# EAGLE board 3ch mix 1.2 (EAGLE 6.5.0)
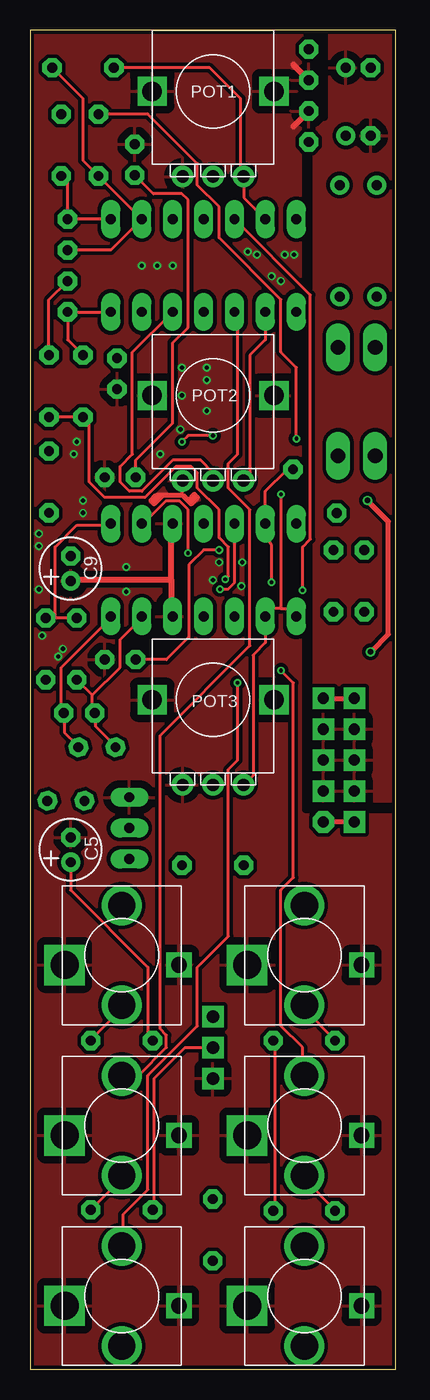
[diagram p0: board, top side]
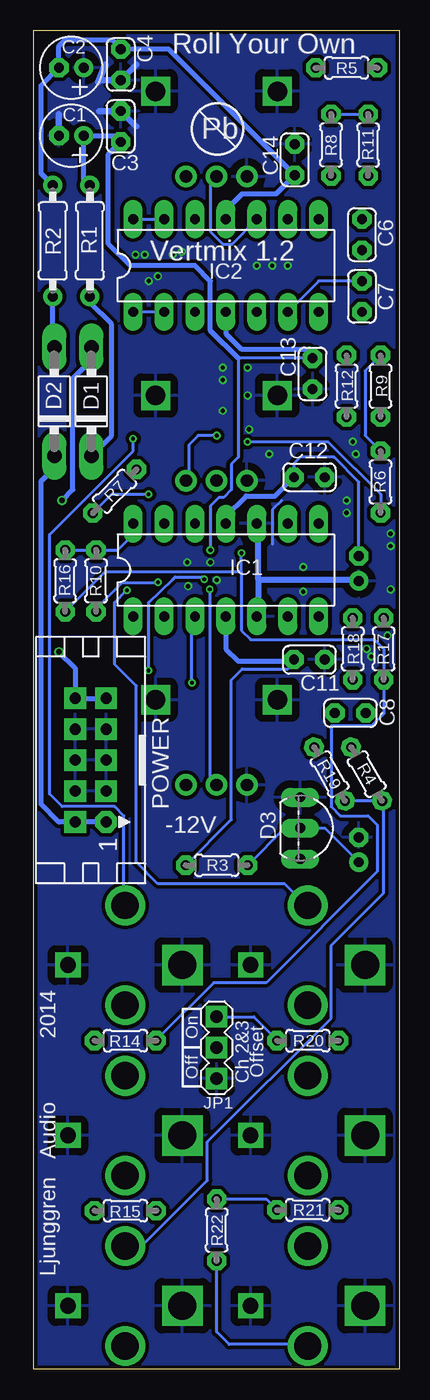
[diagram p1: board, bottom side, seen from below]

Size 30 x 110 mm. Coordinates in mm from the lower left corner, seen from the top.
Outline: 30,0 30,110 0,110 0,0 30,0
Copper layers (1*16): Top 0.035mm / dielectric 1.5mm / Bottom 0.035mm
Design rules "hackvana 15 mil pads 24 mil thermal": minimum track width 6mil, minimum drill 0.3mm, track to track 6mil, track to pad 6mil, pad to pad 6mil, via to via 6mil, smd to smd 0mil, copper to edge 6mil, drill to drill 6mil, minimum pad ring 15mil, minimum via ring 6mil, stop-mask expansion 2mil, vias tented up to drill 100mil, thermal gap 24mil
tRestrict: area 22.6,54.4 to 22.9,100.1; area 22.6,46 to 22.9,54.4; area 22.9,46 to 30,46.2; area 23.9,102.9 to 24.1,110; area 4.3,64.5 to 11.9,65.3; area 11.2,63.2 to 11.9,64.5; area 11.2,65.3 to 11.9,68.1; area 3,63.8 to 3.6,64; area 11.4,70.9 to 11.9,71.1; area 11.4,60.2 to 11.9,60.5; area 22.6,104.1 to 23.1,105.2
bRestrict: area 22.6,46 to 22.9,54.4; area 22.9,99.8 to 30,100.1; area 27.7,46.7 to 27.9,53.3; area 4.3,64.5 to 11.9,65.3; area 11.2,65.3 to 11.9,68.1; area 11.2,63.2 to 11.9,64.5; area 3,63.8 to 3.6,64; area 11.4,70.9 to 11.9,71.1; area 11.4,60.2 to 11.9,60.5; area 22.6,104.1 to 23.1,105.2

## Footprints (pad centres in the part's own frame; a part is rotated, then mirrored left to right if it is on the bottom)
E2-5 = drill 0.813 pad 1.27: + -1.016,0 | drill 0.813 pad 1.27 octagon: - 1.016,0
C025-024X044 = drill 0.813 octagon: 1 -1.27,0; 2 1.27,0
DO41-7 = drill 1.2 pad 1.6 long: A 4.445,0; C -4.445,0
TO92-LINE = drill 0.813 long: 1 2.54,0; 2 0,0; 3 -2.54,0
DIL14 = drill 0.813 long: 1 -7.62,-3.81; 2 -5.08,-3.81; 3 -2.54,-3.81; 4 0,-3.81; 5 2.54,-3.81; 6 5.08,-3.81; 7 7.62,-3.81; 8 7.62,3.81; 9 5.08,3.81; 10 2.54,3.81; 11 0,3.81; 12 -2.54,3.81; 13 -5.08,3.81; 14 -7.62,3.81
ERTHENVAR = drill 2.3 square: RING1 -4.7,-0.8 | drill 1.3 square: RING2 4.7,-0.8 | drill 2.25: SHUNT 0,-4.1; TIP 0,4.1
MA03-1 = drill 1.016 square: 1 -2.54,0; 2 0,0; 3 2.54,0
POT-ALPHA9 = drill 1.6 pad 2.184 square: GND$1 -5,0; GND$2 5,0 | drill 1: LEFT -2.5,-7; MID 0,-7; RIGHT 2.5,-7
CON10L = drill 0.914 pad 1.778 octagon: 1 5.08,1.27 | drill 0.914 pad 1.778 square: 2 5.08,-1.27; 3 2.54,1.27; 4 2.54,-1.27; 5 0,1.27; 6 0,-1.27; 7 -2.54,1.27; 8 -2.54,-1.27; 9 -5.08,1.27; 10 -5.08,-1.27
0207/9 = drill 0.813: 1 -4.58,0; 2 4.58,0
0204/5 = drill 0.813 octagon: 1 -2.54,0; 2 2.54,0

## Placement (x,y rotation side)
C1  10uF  [E2-5]  26.92,101.35 180 bottom
C2  10uF  [E2-5]  26.92,106.93 180 bottom
C3  100nF  [C025-024X044]  22.86,102.11 90 bottom
C4  100nF  [C025-024X044]  22.86,107.19 90 bottom
C5  10uF  [E2-5]  3.3,42.67 90 top
C6  68pF  [C025-024X044]  3.05,93.22 270 bottom
C7  68pF  [C025-024X044]  3.05,88.14 90 bottom
C8  68pF  [C025-024X044]  4,53.91 0 bottom
C9  10uF  [E2-5]  3.3,65.79 90 top
C11  100nF  [C025-024X044]  7.37,58.29 0 bottom
C12  100nF  [C025-024X044]  7.37,73.28 180 bottom
C13  100nF  [C025-024X044]  7.11,81.79 270 bottom
C14  100nF  [C025-024X044]  8.57,99.38 270 bottom
D1  SB130  [DO41-7]  25.27,79.5 90 bottom
D2  SB130  [DO41-7]  28.32,79.5 90 bottom
D3  LM4040 5V  [TO92-LINE]  8.13,44.45 270 bottom
IC1  TL074  [DIL14]  14.22,65.66 0 bottom
IC2  TL074  [DIL14]  14.22,90.68 0 bottom
IN1  ERTHENVAR_3.5MM_JACK  [ERTHENVAR]  7.5,34 0 top
IN2  ERTHENVAR_3.5MM_JACK  [ERTHENVAR]  7.5,20 0 top
IN3  ERTHENVAR_3.5MM_JACK  [ERTHENVAR]  7.5,6 0 top
JP1  [MA03-1]  14.99,26.42 90 bottom
OUT1  ERTHENVAR_3.5MM_JACK  [ERTHENVAR]  22.5,34 0 top
OUT2  ERTHENVAR_3.5MM_JACK  [ERTHENVAR]  22.5,20 0 top
OUT3  ERTHENVAR_3.5MM_JACK  [ERTHENVAR]  22.5,6 0 top
POT1  22K  [POT-ALPHA9]  15,105 0 top
POT2  22K  [POT-ALPHA9]  15,80 0 top
POT3  22K  [POT-ALPHA9]  15,55 0 top
POWER  [CON10L]  25.34,50.04 270 bottom
R1  10R  [0207/9]  25.4,92.71 90 bottom
R2  10R  [0207/9]  28.45,92.71 90 bottom
R3  10K  [0204/5]  14.99,41.4 180 bottom
R4  330R  [0204/5]  2.67,48.9 300 bottom
R5  22K  [0204/5]  4.32,106.93 0 bottom
R6  22K  [0204/5]  1.52,72.9 90 bottom
R7  22K  [0204/5]  23.37,72.14 45 bottom
R8  22K  [0204/5]  5.59,100.58 90 bottom
R9  22K  [0204/5]  1.52,80.77 270 bottom
R10  22K  [0204/5]  24.89,64.77 90 bottom
R11  330R  [0204/5]  2.54,100.58 90 bottom
R12  330R  [0204/5]  4.32,80.77 270 bottom
R14  22K  [0204/5]  22.48,26.99 0 bottom
R15  22K  [0204/5]  22.48,13.02 0 bottom
R16  22K  [0204/5]  27.43,64.77 270 bottom
R17  22K  [0204/5]  1.27,59.18 90 bottom
R18  22K  [0204/5]  3.81,59.18 270 bottom
R19  22K  [0204/5]  5.71,48.9 300 bottom
R20  22K  [0204/5]  7.49,26.99 0 bottom
R21  22K  [0204/5]  7.49,13.08 0 bottom
R22  22K  [0204/5]  14.99,11.43 270 bottom

## Library data of the parts
C1-C9 C11-C14 D1-D3 IC1 IC2 IN1-IN3 OUT1-OUT3 POT1-POT3 R1-R12 R14-R22 = Roll Your Own
JP1 POWER = Roll Your Own; OC_FARNELL: unknown; OC_NEWARK: unknown

## Nets
0V: C1.- C2.+ C3.2 C4.1 C5.- C9.+ C11.2 C12.1 C13.2 C14.1 D3.3 IC1.5 IC1.10 IN1.RING1 IN1.RING2 IN2.RING1 IN2.RING2 IN3.RING1 IN3.RING2 JP1.1 OUT1.RING1 OUT1.RING2 OUT2.RING1 OUT2.RING2 OUT3.RING1 OUT3.RING2 POT1.GND$1 POT1.GND$2 POT1.LEFT POT2.GND$1 POT2.GND$2 POT2.LEFT POT3.GND$1 POT3.GND$2 POT3.LEFT POWER.3 POWER.4 POWER.5 POWER.6 POWER.7 POWER.8
+12V: C1.+ C3.1 C11.1 C13.1 IC1.4 IC2.4 R1.2 R3.2
-12V: C2.- C4.2 C9.- C12.2 C14.2 IC1.11 IC2.11 R2.2
N$1: D1.A POWER.9 POWER.10
N$2: D2.C POWER.1 POWER.2
N$3: IC1.8 R17.2 R18.1
N$4: C8.1 IC1.6 R18.2 R19.1
N$5: D1.C R1.1
N$6: D2.A R2.1
N$7: C5.+ D3.2 JP1.3 R3.1 R20.1
N$8: C6.1 IC2.8 R11.1
N$9: IC2.12 IN1.TIP
N$10: IC2.3 IN2.TIP
N$11: IC1.3 IN3.TIP
N$12: IC2.13 IC2.14 POT1.RIGHT R5.1
N$13: IC2.1 IC2.2 POT2.RIGHT R6.1
N$14: IC1.1 IC1.2 POT3.RIGHT R7.1
N$15: C6.2 IC2.9 R5.2 R8.1
N$16: IC2.10 POT1.MID
N$17: IC2.5 POT2.MID
N$18: IC1.12 POT3.MID
N$19: OUT1.TIP R8.2 R11.2
N$20: OUT2.TIP R9.2 R12.2
N$21: C7.2 IC2.6 R6.2 R9.1
N$22: IC1.13 R7.2 R10.1
N$23: OUT3.TIP R4.2 R19.2
N$24: C7.1 IC2.7 R12.1
N$25: IC1.14 R10.2 R16.1
N$26: OUT1.SHUNT R14.1
N$27: OUT2.SHUNT R15.1
N$28: IC1.9 R14.2 R15.2 R16.2 R17.1
N$29: C8.2 IC1.7 R4.1
N$30: IN1.SHUNT R20.2
N$31: IN2.SHUNT R21.2
N$32: IN3.SHUNT R22.2
N$33: JP1.2 R21.1 R22.1

## Tracks (layer width: path | path; a pad name or v marks a point on that pad's centre or on a via)
0V  (via drill 0.35)
  Top 0.23: 12.45,73.15 12.45,71.88 12.51,71.82
  Top 0.25: 3.56,64.9 3.43,64.77 C9.+ | IC1.10 11.56,69.34 11.56,69.09 | 11.56,62.23 11.68,62.1 IC1.5
  Top 0.4: 10.79,71.82 10.35,71.82 9.91,71.37 10.16,71.12 10.79,71.75 10.79,71.82 | 10.79,71.82 12.51,71.82 12.95,71.37 | 12.95,71.37 13.21,71.12 13.72,71.63 13.46,71.88 12.95,71.37
  Top 0.5: 21.59,102.11 22.61,103.12 | C4.1 21.59,107.19 | 3.56,65.02 3.56,64.9 11.56,64.9 | 11.56,64.9 11.56,69.09 | 11.56,64.9 11.56,62.23
  Bottom 0.23: 9.65,71.37 10.41,70.61 10.41,67.75
  Bottom 0.25: 11.56,62.23 11.68,62.1 IC1.5
  Bottom 0.5: C4.1 21.59,107.19 | C3.2 21.59,102.11 | 11.56,64.9 3.56,64.9 | 11.56,64.9 11.56,69.09 | 11.56,64.9 11.56,62.23
  Bottom 0.55: 24.13,107.19 24.7,105.73 | C4.1 24.51,105.92 | C3.2 24.64,103.38 | C1.- 27.94,103.12
  other vias: 18.61,91.57 14.48,82.3 12.45,82.3 12.45,80.01 12.32,77.22 14.48,81.28 14.48,78.74 20.57,89.41 19.81,89.79 17.84,91.82 20.89,91.57 21.65,91.57 11.68,90.68 10.41,90.68 9.14,90.68 4.32,71.37 3.81,76.2 3.56,75.18 0.7,68.64 0.7,67.63 0.7,64.07 4.32,70.36 7.87,65.91 7.87,63.88 0.95,60.26 2.67,59.18 2.29,58.55 15.49,66.29 14.99,64.83 10.67,75.18 17.4,66.29 17.34,64.33
  pour Bottom (isolate 0.305): -0.07,0 -0.07,110.03 30,110.03 30,0
  pour Top (isolate 0.305): -0.07,0.1 -0.07,110.03 30,110.03 30,-0.1 -0.18,-0.1
+12V  (via drill 0.35)
  Top 0.25: v15.49,67.31 14.22,67.31 13.02,66.1 13.02,60.13 11.18,58.29 C11.1
  Bottom 0.23: R3.2 13.78,45.15 13.78,56.64 12.89,57.53 9.14,57.53 8.64,58.04 C11.1
  Bottom 0.25: C13.1 13.21,83.06 13.21,74.93 13.78,74.36 13.78,72.26 14.41,71.63 14.8,71.63 15.49,70.93 v15.49,67.31
  Bottom 0.4: R1.2 25.91,97.8 C1.+ 23.37,101.35 C3.1 23.88,99.82 23.88,92.46 22.1,90.68 16.76,90.68 15.49,89.41 15.49,85.34 13.21,83.06 | IC2.4 14.22,85.09 12.95,83.82 7.37,83.82 7.11,83.57 C13.1 | IC1.4 14.22,59.18 13.21,58.17 8.76,58.17 C11.1
-12V
  Top 0.25: C12.2 8.64,74.68 11.68,77.72 11.68,84.33 12.95,85.6 12.95,96.08 12.45,96.58 10.1,96.58 C14.2
  Bottom 0.25: C9.- 3.3,72.9 5.33,74.93 8.13,74.93 8.64,74.42 C12.2
  Bottom 0.4: R2.2 29.4,98.24 29.4,105.47 C2.- 27.94,108.71 27.43,109.22 23.62,109.22 C4.2 18.92,108.46 C14.2 10.1,96.58 12.89,96.58 14.22,95.25 IC2.11 | IC1.11 14.22,70.1 12.57,71.75 10.16,71.75 C12.2
N$1  (via drill 0.45)
  Top 0.4: POWER.9 POWER.10 | v27.69,71.37 29.4,69.66 29.4,60.39 v27.94,58.93
  Bottom 0.4: POWER.9 POWER.10 26.61,57.59 v27.94,58.93 | v27.69,71.37 26.8,72.26 26.8,81.41 25.4,82.8 25.4,83.82 D1.A
N$2
  Top 0.4: POWER.2 POWER.1
  Bottom 0.4: POWER.1 POWER.2 27.94,44.96 29.4,46.42 29.4,72.96 28.45,73.91 28.45,74.93 D2.C
N$3
  Top 0.23: R18.1 2.03,61.72 | 2.03,61.72 2.03,67.56 3.81,69.34 6.6,69.34 IC1.8 | 2.03,61.72 R17.2
N$4
  Top 0.23: R19.1 6.86,51.31 5.33,52.83 5.33,53.85 C8.1 5.08,54.1 5.08,55.37 | 5.08,55.37 R18.2 | 5.08,55.37 7.37,57.66 7.37,59.94 9.14,61.72 IC1.6
N$5
  Bottom 0.4: D1.C 23.62,76.71 23.62,85.85 25.4,87.63 R1.1
N$6
  Bottom 0.4: D2.A 28.45,84.07 R2.1
N$7
  Top 0.23: C5.+ 3.3,39.37 9.65,33.02 9.65,27.43 9.91,27.18 R20.1
  Bottom 0.23: JP1.3 11.94,28.96 10.16,27.18 R20.1 | C5.+ 6.1,44.45 D3.2 9.4,44.45 R3.1
N$8
  Top 0.23: IC2.8 C6.1 3.05,97.54 R11.1
N$9  (via drill 0.3)
  Top 0.23: v22.35,64.01 22.35,67.56 22.99,68.2 22.99,88.27 IC2.12
  Bottom 0.23: IN1.TIP 7.62,38.1 9.4,39.88 19.81,39.88 21.59,41.66 21.59,56.13 23.37,57.91 23.37,62.99 v22.35,64.01
N$10
  Top 0.23: IC2.3 17.02,86.61 17.02,75.18 16.26,74.42 16.26,72.39 18.03,70.61 18.03,59.44 10.67,52.07 10.67,27.94 11.18,27.43 11.18,26.42 8.89,24.13 7.62,24.13 IN2.TIP
N$11  (via drill 0.3)
  Top 0.23: v17.02,56.39 17.02,50.04 16.26,49.28 16.26,35.56 13.72,33.02 13.72,28.19 9.65,24.13 9.65,14.73 7.62,12.7 7.62,10.16 IN3.TIP
  Bottom 0.23: v17.02,56.39 17.02,61.59 IC1.3
N$12
  Top 0.23: R5.1 14.73,106.93 17.27,104.39 17.27,98.04 POT1.RIGHT 17.53,97.79 17.53,96.27 IC2.13
  Bottom 0.23: IC2.14 IC2.13
N$13  (via drill 0.3, 0.35)
  Top 0.23: v14.99,76.71 12.95,76.71 v12.45,76.2 | IC2.2 19.3,84.58 18.03,83.31 18.03,73.66 17.53,73.15 POT2.RIGHT
  Bottom 0.23: R6.1 1.52,71.88 5.84,76.2 v12.45,76.2 | IC2.2 IC2.1 | v14.99,76.71 16.51,76.71 17.27,75.95 17.27,73.23 POT2.RIGHT
N$14  (via drill 0.3)
  Top 0.23: v20.57,71.88 20.57,62.48 | 20.57,62.48 19.56,62.48 19.56,62.23 IC1.2 19.3,59.69 18.29,58.67 18.29,48.77 17.53,48.01 POT3.RIGHT | 20.57,62.48 21.59,62.48 21.84,62.23 IC1.1
  Bottom 0.23: R7.1 23.62,71.88 v20.57,71.88
N$15
  Top 0.23: C6.2 6.6,91.95 IC2.9 R8.1 4.32,99.31 4.32,104.39 R5.2
N$16
  Bottom 0.23: IC2.10 13.72,92.46 14.48,92.46 15.49,93.47 15.49,97.79 15.24,97.79 POT1.MID
N$17
  Top 0.23: IC2.5 8.38,83.57 8.38,75.18 7.37,74.17 7.37,72.9 8.13,72.14 9.14,72.14 11.68,74.68 13.97,74.68 14.99,73.66 14.99,73.15 POT2.MID
N$18  (via drill 0.3)
  Top 0.23: IC1.12 16.76,64.64 16.19,64.07 v15.56,64.07
  Bottom 0.23: v15.56,64.07 15.56,48.56 POT3.MID
N$19  (via drill 0.3)
  Top 0.23: R8.2 9.65,103.12 13.72,99.06 13.72,97.28 15.49,95.5 15.49,92.96 20.57,87.88 20.57,83.57 21.84,82.3 v21.84,76.45
  Bottom 0.23: R8.2 R11.2 | v21.84,76.45 21.84,75.44 28.7,68.58 28.7,47.24 27.69,46.23 23.37,46.23 22.61,45.47 22.61,38.1 OUT1.TIP
N$20  (via drill 0.3)
  Top 0.23: R9.2 R12.2 4.83,77.72 4.83,72.9 6.1,71.63 9.4,71.63 11.94,74.17 13.21,74.17 13.72,73.66 13.72,72.39 15.49,70.61 15.49,68.33 16.26,67.56 16.26,65.15 v16,64.9 | v20.57,57.4 21.59,56.39 21.59,40.39 20.57,39.37 20.57,28.19 22.35,26.42 22.35,24.13 OUT2.TIP
  Bottom 0.23: v16,64.9 16.19,65.09 18.41,65.09 18.61,64.9 20.57,62.99 v20.57,57.4
N$21
  Top 0.23: C7.2 1.52,87.88 R9.1
  Bottom 0.23: R6.2 2.79,76.71 2.79,82.04 R9.1 | IC2.6 6.6,89.41 C7.2
N$22  (via drill 0.3)
  Top 0.23: v19.81,64.64 19.81,67.69 19.3,68.45 IC1.13 19.3,72.14 21.08,73.91 R7.2
  Bottom 0.23: R10.1 24.89,62.48 22.73,64.64 v19.81,64.64
N$23
  Bottom 0.23: R19.2 R4.2 1.27,46.48 1.27,39.12 5.59,34.8 5.59,28.83 15.75,18.67 15.75,15.49 21.08,10.16 22.35,10.16 OUT3.TIP
N$24
  Top 0.23: R12.1 3.05,84.58 C7.1 IC2.7
N$25
  Bottom 0.23: R16.1 R10.2 23.11,67.31 21.84,68.58 IC1.14
N$26
  Top 0.23: R14.1 24.89,27.18 22.61,29.46 22.61,29.72 OUT1.SHUNT
N$27
  Top 0.23: R15.1 24.89,13.21 22.61,15.49 22.61,15.75 OUT2.SHUNT
N$28  (via drill 0.3)
  Top 0.23: R15.2 20.07,13.21 20.07,26.92 R14.2 | v12.95,67.06 12.95,70.61 12.26,71.31 11.11,71.31 9.14,69.34 IC1.9
  Bottom 0.23: 12.95,65.53 12.95,60.71 12.19,59.94 2.03,59.94 1.27,59.18 R17.1 1.27,53.85 2.29,52.83 5.59,52.83 5.59,46.23 4.83,45.47 2.54,45.47 1.78,44.7 1.78,40.89 10.92,31.75 15.24,31.75 19.81,27.18 R14.2 | 12.95,65.53 24.13,65.53 R16.2 | 12.95,65.53 v12.95,67.06
N$29
  Top 0.23: R4.1 3.81,51.31 2.79,52.32 2.79,53.85 C8.2 2.54,54.1 2.54,57.66 6.6,61.72 IC1.7
N$30
  Top 0.23: R20.2 5.08,27.18 7.37,29.46 7.37,29.72 IN1.SHUNT
N$31
  Top 0.23: R21.2 7.37,15.49 7.37,15.75 IN2.SHUNT
N$32
  Bottom 0.23: R22.2 14.99,3.05 13.97,2.03 7.62,2.03 IN3.SHUNT
N$33
  Top 0.23: R21.1 10.16,13.21 10.16,23.88 12.7,26.42 JP1.2
  Bottom 0.23: R21.1 10.92,13.97 R22.1

## Text on the board
bPlace: Roll Your Own | Pb | Vertmix 1.2 | -12V | On | 2014 | Offset | Off | Ch 2&3 | Ljunggren Audio